# Allegro board PROIECT-PCB-v3.brd
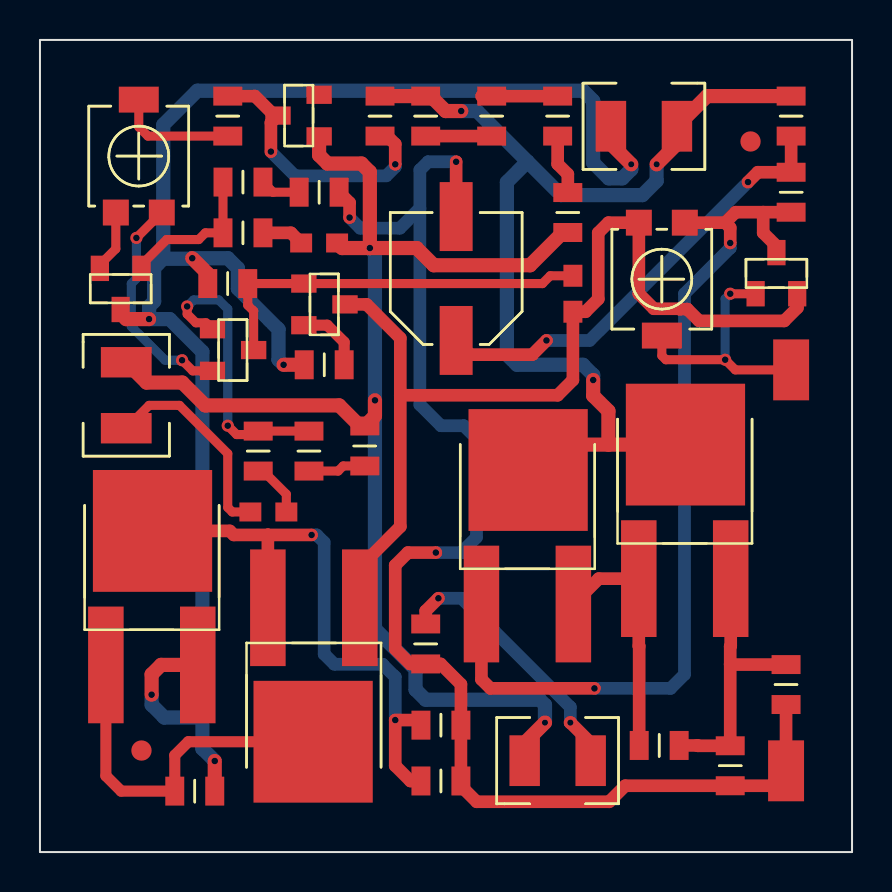
[diagram p0: board, top side]
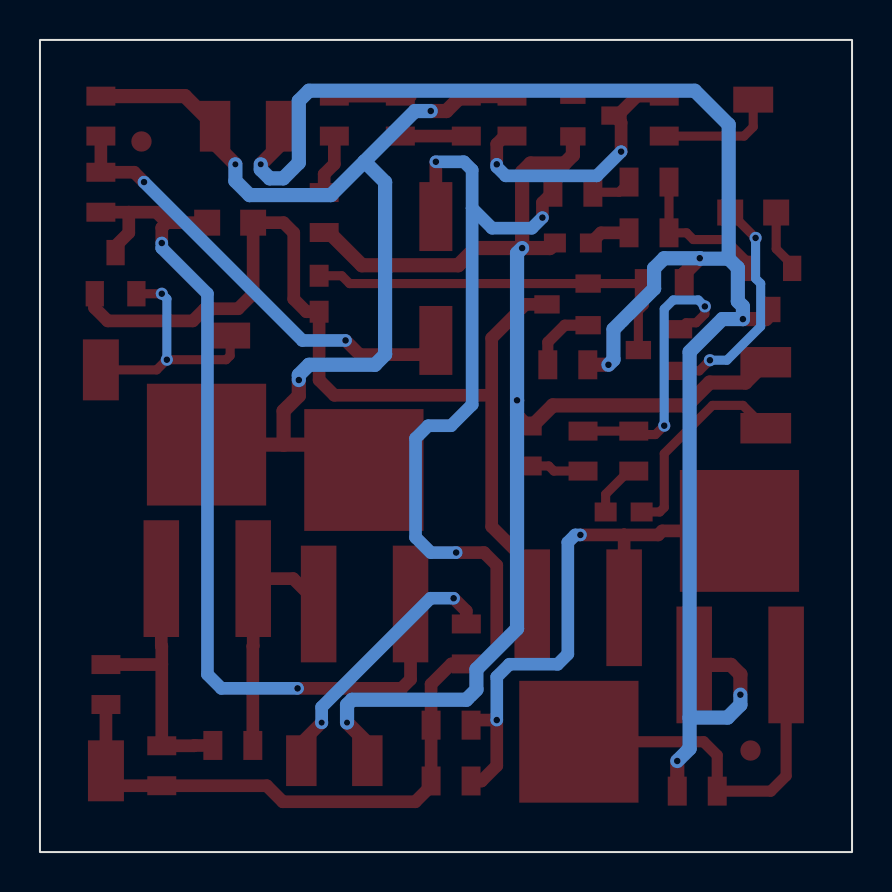
[diagram p1: board, bottom side, seen from below]

Outline 40.64 x 40.64 mm; copper layers: TOP, BOTTOM. Coordinates in mm from the lower left corner of the outline.
Outline path: rectangle 0,0 40.64,40.64

## Design rules (mm)
nets with their own width: min track width 0.457; nets N17839 N18413 N18419 N18433 N18443 N18567 N18575 N18713 N20372 N20376 SIGNAL-IN
nets with their own width: min track width 0.559; nets N18985 N19025
nets with their own width: min track width 0.635; nets N17849 N17953 N18017 N18083 N18151 N18611 N18637 N18835 N24736 N25913 N26075 N26146 SIGNAL-OUT
nets with their own width: min track width 0.711; nets +27V -27V GND

## Placement (name value [footprint] x y rotation side)
AAP-STEFAN MIHAI 432A  CON1  [unnamed#3]  37.59 24.13 90 top
C1  4.7u  [CAPC2008X126N_0805]  11.43 17.02 0 top
C2  4.7u  [CAPC2008X126N_0805]  13.97 30.48 0 top
C3  10u  [CAPAE660X770N]  20.83 28.7 90 top
C4  4.7p  [CAPC2008X126N_0805]  26.67 27.94 270 top
D1  BZX84-C10  [TO236AB]  13.97 35.81 0 top
D2  LED  [RES2012X50N_0805]  26.42 32 270 top
IN  -  [unnamed]  4.32 22.86 90 top
J5  CON1  [SMD_PAD_3-05_1-80]  37.34 4.06 270 top
NOREF  -  [#2]  0 0 0 top
NOREF#2  Value  [unnamed#2]  35.56 35.56 0 top
NOREF#3  Value  [unnamed#2]  5.08 5.08 0 top
OUT  -  [unnamed]  25.91 4.57 180 top
Q1  QBC856B  [TO236AB]  8.64 26.16 180 top
Q2  QBC856B  [TO236AB]  5.08 29.21 90 top
Q3  QBC817-25  [TO236AB]  13.21 28.45 180 top
Q4  QBC846B  [TO236AB]  35.81 27.94 270 top
Q5  QMJD31C  [TO252AA]  22.1 12.45 0 top
Q6  QMJD32CT4G  [TO252AA]  16 12.19 180 top
Q7  QMJD31C  [TO252AA]  29.97 13.72 0 top
Q8  QMJD31C  [TO252AA]  3.3 9.4 0 top
R1  4.7  [RES2012X50N_0805]  10.92 20.07 90 top
R7  3.3k  [RES2012X50N_0805]  17.02 36.83 90 top
R8  15k  [RES2012X50N_0805]  9.4 36.83 90 top
R9  500  [TS53YL]  6.1 32 270 top
R10  3.3k  [RES2012X50N_0805]  10.16 30.99 0 top
R11  5.6k  [RES2012X50N_0805]  9.4 28.45 180 top
R12  330  [RES2012X50N_0805]  37.59 36.83 270 top
R13  3.3k  [RES2012X50N_0805]  37.59 33.02 270 top
R14  5k  [TS53YL]  29.97 31.5 90 top
R15  33  [RES2012X50N_0805]  14.22 24.38 180 top
R26  0.47  [RES2012X50N_0805]  30.99 5.33 0 top
R27  0.47  [RES2012X50N_0805]  7.75 3.05 0 top
R30  4.7  [RES2012X50N_0805]  19.3 10.41 90 top
R31  8.2k  [RES2012X50N_0805]  10.16 33.53 0 top
R32  22k  [RES2012X50N_0805]  13.97 33.02 0 top
R61  8.2k  [RES2012X50N_0805]  13.46 20.07 270 top
R62  22k  [RES2012X50N_0805]  16.26 20.32 90 top
R71  1k  [RES2012X50N_0805]  19.3 36.83 90 top
R72  220  [RES2012X50N_0805]  22.61 36.83 90 top
R73  33  [RES2012X50N_0805]  25.91 36.83 270 top
R281  1  [RES2012X50N_0805]  34.54 4.32 270 top
R282  0.47  [RES2012X50N_0805]  37.34 8.38 270 top
R291  1  [RES2012X50N_0805]  20.07 3.56 180 top
R292  0.47  [RES2012X50N_0805]  20.07 6.35 180 top
UNK+27V  -  [unnamed]  30.23 36.32 0 top

## Library data of the parts
C1 C2 C4 = CAP
C3 = CAPACITOR POL/SM_0
D1 = TCR22-2/TO_0
D2 = LED
J5 = CON1
Q1 = PNP BCE_0
Q2 = PNP BCE_1
Q3 = NPN BCE_0
Q4 = NPN BCE_1
Q5 Q7 Q8 = NPN BCE
Q6 = PNP BCE
R1 R7 R8 R10-R13 R15 R26 R27 R30-R32 R61 R62 R281 R282 R291 R292 = R
R9 R14 = POT
R71-R73 = RESISTOR

## Footprints (pads in the part's own frame, mm; a bottom-side part is the same pattern mirrored in y, then rotated)
CAPAE660X770N
  rect 3.45x1.65 smd: 1(-3.1,0) 2(3.1,0)
CAPC2008X126N_0805
  rect 1.1x0.95 smd: 1(-0.9,0) 2(0.9,0)
RES2012X50N_0805
  rect 0.95x1.45 smd: 1(-1,0) 2(1,0)
SMD_PAD_3-05_1-80
  rect 3.05x1.8 smd: 1(0,0)
TO236AB
  rect 1.27x0.914 smd: 1(0,0) 2(0,2.083) 3(-2.057,1.041)
TO252AA
  rect 1.778x5.842 smd: 1(-0.004,-0.034) 3(4.596,-0.034)
  rect 5.969x6.096 smd: 2(2.332,6.673)
TS53YL
  rect 1.3x1.3 smd: 1(0,0) 3(0,-2.3)
  rect 1.3x2 smd: 2(-5.65,-1.15)
unnamed
  rect 1.524x2.54 smd: 1(-1.651,0) 2(1.651,0)
unnamed#3
  rect 3.05x1.8 smd: 1(0,0)
unnamed#2
  round 1.016 smd: 1(0,0)

## Nets
+27V: Q5.2 Q7.2 R7.2 R12.1 R71.2 UNK+27V.2
-27V: Q2.3 Q8.3(E) R11.2 R15.2 R27.2 UNK+27V.1
GND: C2.2 D1.1 D2.2(CATHODE) IN.2 OUT.2 R62.2
SIGNAL-IN: C1.1 IN.1
SIGNAL-OUT: OUT.1 R30.2
N17839: R8.1 R9.2(WIPER)
N17849: D1.3 R7.1 R8.2
N17953: Q4.3 Q5.1 R13.2 R14.3
N18017: Q5.3(E) Q7.1 R26.1
N18083: C3.1 R12.2 R13.1
N18151: Q7.3(E) R26.2 R281.1 R282.1
N18413: C1.2 R1.1
N18419: Q1.1 R1.2 R61.1
N18433: Q2.1 R10.1 R31.1
N18443: R31.2 R32.1
N18567: C4.1 Q1.3 Q3.1 R11.1
N18575: AAP-STEFAN MIHAI 432A.1 Q4.1 R14.2(WIPER)
N18611: C4.2 Q3.3 Q4.2(E) Q6.1 R14.1
N18637: C3.2(CATHODE) J5.1 R30.1 R32.2 R281.2 R282.2 R291.1 R292.1
N18713: R61.2 R62.1
N18835: Q6.3(E) Q8.2 R291.2 R292.2
N18985: Q6.2 Q8.1 R27.1
N19025: Q3.2(E) R15.1
N20372: Q2.2(E) R9.3
N20376: Q1.2(E) R9.1
N24736: C2.1 R10.2
N25913: R72.2 R73.1
N26075: D2.1 R73.2
N26146: R71.1 R72.1

Pads without a net: D1 2; NOREF#2 1; NOREF#3 1

## Via types
v1: diameter 0.61, hole 0.33, TOP to BOTTOM, 27 vias
v2: diameter 0.66, hole 0.305, TOP to BOTTOM, 4 vias

## Routing (per net, layer and track width the routed paths; a pad name or vN(x,y) marks a point on that pad's centre or on a via; arc(x,y) is an arc through that point)
+27V: length 52.7
  TOP w0.711: R12.1 33.38,37.83 UNK+27V.2 31.88,35.43 v2(30.86,34.42) ; Q7.2 28.45,20.39 ; 28.45,20.39 28.45,22.07 27.69,22.83 v1(27.69,23.62) ; 28.45,20.39 25.7,20.39 Q5.2 ; v1(21.08,37.08) 20.3,37.08 19.55,37.83 R71.2 R7.2
  BOTTOM w0.711: v2(30.86,34.42) 30.86,33.59 30.15,32.88 26.08,32.88 24.4,34.56 ; v1(27.69,23.62) 27.69,23.88 27.18,24.38 23.88,24.38 23.37,24.89 23.37,33.53 24.4,34.56 ; 24.4,34.56 21.87,37.08 v1(21.08,37.08)
-27V: length 87.1
  TOP w0.711: v1(12.19,24.38) R15.2 ; v2(29.59,34.42) 28.57,35.43 UNK+27V.1 ; v1(5.59,7.87) 5.59,8.89 6.06,9.36 Q8.3 ; v1(5.46,26.67) 4.32,26.67 4.04,26.95 Q2.3 ; R27.2 v1(8.75,4.56) ; v1(7.62,29.72) 8.4,28.94 R11.2 8.38,28.43
  BOTTOM w0.711: 8.13,6.73 8.13,5.17 v1(8.75,4.56) ; 8.13,6.73 8.13,25.03 6.49,26.67 v1(5.46,26.67) 5.46,27.3 5.71,27.56 5.71,29.24 6.17,29.69 ; 8.13,6.73 6.22,6.73 5.59,7.37 v1(5.59,7.87) ; 6.17,29.69 6.17,36.4 7.87,38.1 27.18,38.1 27.69,37.59 27.69,34.49 28.46,33.72 29.14,33.72 29.59,34.16 v2(29.59,34.42) ; 6.17,29.69 7.6,29.69 v1(7.62,29.72) 9.4,29.72 9.91,29.21 9.91,28.19 11.94,26.16 11.94,24.64 v1(12.19,24.38)
GND: length 68.1
  TOP w0.711: v1(16.51,30.23) 15.12,30.23 C2.2 ; v1(16.51,30.23) 18.85,30.23 19.71,29.37 24.53,29.37 26.17,31 D2.2 ; v1(16.51,30.23) 16.51,34.04 16.09,34.46 14.39,34.46 13.97,34.87 D1.1 ; v1(16.76,22.61) 16.76,21.83 R62.2 16.01,21.32 14.97,22.35 8.27,22.35 7.12,23.5 5.33,23.5 IN.2 ; OUT.2 24.26,5.46 v2(25.27,6.48)
  BOTTOM w0.711: v1(16.51,30.23) 16.76,29.97 v1(16.76,22.61) 16.76,11.18 18.8,9.14 18.8,8.13 19.3,7.62 25.02,7.62 25.27,7.37 v2(25.27,6.48)
SIGNAL-IN: length 10.5
  TOP w0.457: C1.1 9.62,17.02 9.4,17.24 9.4,19.94 6.99,22.35 5.46,22.35 IN.1
SIGNAL-OUT: length 13.5
  TOP w0.635: R30.2 19.3,12.06 v1(19.94,12.7) ; v2(26.54,6.48) 27.56,5.46 OUT.1
  BOTTOM w0.635: v2(26.54,6.48) 26.54,7.25 21.09,12.7 v1(19.94,12.7)
N17839: length 6
  TOP w0.457: R8.1 5.4,35.83 4.95,36.29 R9.2
N17849: length 13.8
  TOP w0.635: v1(11.56,35.05) 11.56,36.5 D1.3 11.73,36.86 10.76,37.83 R8.2 ; R7.1 17.38,35.83 17.78,35.43 v1(17.78,34.42)
  BOTTOM w0.635: v1(17.78,34.42) 17.78,34.29 17.33,33.84 12.77,33.84 v1(11.56,35.05)
N17953: length 45.9
  TOP w0.635: Q4.3 36.86,30.33 36.2,30.99 36.2,32.02 ; 36.2,32.02 R13.2 ; 36.2,32.02 34.81,32.02 34.29,31.5 ; 34.29,31.5 R14.3 ; 34.29,31.5 34.54,31.24 v1(34.54,30.48) ; Q5.1 22.09,8.64 22.54,8.19 v1(27.75,8.19)
  BOTTOM w0.635: v1(27.75,8.19) 31.56,8.19 32.26,8.89 32.26,27.94 34.54,30.23 v1(34.54,30.48)
N18017: length 12.2
  TOP w0.635: Q5.3 27.96,13.68 Q7.1 29.97,10.32 29.99,10.3 R26.1
N18083: length 22.6
  TOP w0.635: R12.2 R13.1 35.92,34.02 v1(35.43,33.53) ; C3.1 21.54,24.89 24.64,24.89 v1(25.35,25.6)
  BOTTOM w0.635: v1(35.43,33.53) 27.51,25.6 v1(25.35,25.6)
N18151: length 13.7
  TOP w0.635: 34.54,9.4 R281.1 32.92,5.32 32.91,5.33 R26.2 ; 34.54,9.4 34.56,9.38 R282.1 ; 34.54,9.4 34.54,10.29 34.57,10.32 Q7.3
N18413: length 2.8
  TOP w0.457: R1.1 11.17,19.07 12.33,17.91 C1.2
N18419: length 14.5
  TOP w0.457: Q1.1 8.31,26.49 7.8,26.49 7.37,26.92 v1(7.37,27.3) ; R61.1 R1.2 10.75,20.89 9.84,20.89 v1(9.4,21.34)
  BOTTOM w0.457: v1(7.37,27.3) 7.69,27.63 8.95,27.63 9.4,27.18 v1(9.4,21.34)
N18433: length 7.5
  TOP w0.457: R31.1 R10.1 8.28,30.99 7.94,30.65 6.34,30.65 5.08,29.39 Q2.1
N18443: length 2
  TOP w0.457: R32.1 11.67,33.02 R31.2
N18567: length 19.9
  TOP w0.457: C4.1 25.54,28.84 25.15,28.45 Q3.1 R11.1 10.4,27.37 10.69,27.07 Q1.3
N18575: length 12.4
  TOP w0.457: v1(34.54,27.94) Q4.1 ; R14.2 31.12,24.84 31.32,24.64 v1(34.29,24.64) 34.8,24.13 AAP-STEFAN MIHAI 432A.1
  BOTTOM w0.457: v1(34.54,27.94) 34.29,27.69 v1(34.29,24.64)
N18611: length 50.3
  TOP w0.635: 18.03,22.86 18.03,25.72 16.34,27.41 Q3.3 ; 18.03,22.86 25.91,22.86 26.67,23.62 C4.2 27.3,27.04 27.94,27.68 27.94,30.99 28.45,31.5 R14.1 29.97,27.94 30.72,27.19 31.99,27.19 32.01,27.17 32.4,27.17 32.99,26.58 37.25,26.58 37.91,27.24 37.91,27.93 Q4.2 ; 18.03,22.86 18.03,16.29 16.01,14.26 Q6.1
N18637: length 69.1
  TOP w0.635: R32.2 15.49,32.5 v1(15.49,31.75) ; R282.2 J5.1 36.59,3.32 R281.2 29.29,3.32 28.49,2.52 21.86,2.52 21.07,3.31 R291.1 R292.1 21.07,8.4 20.05,9.41 R30.1 18.53,9.41 17.78,10.16 17.78,14.35 18.41,14.99 v1(19.81,14.99) ; C3.2 v1(20.83,34.54)
  BOTTOM w0.635: v1(15.49,31.75) 16.02,31.22 18.01,31.22 19.01,32.22 ; 19.01,32.22 19.01,34.13 19.42,34.54 v1(20.83,34.54) ; 19.01,32.22 19.01,22.39 20.07,21.34 21.21,21.34 21.84,20.7 21.84,15.75 21.08,14.99 v1(19.81,14.99)
N18713: length 2.9
  TOP w0.457: R62.1 15.18,19.32 14.92,19.07 R61.2
N18835: length 29.5
  TOP w0.635: 11.41,15.87 11.41,15.87 v1(13.59,15.87) ; 11.41,15.87 Q6.3 ; 11.41,15.87 11.4,15.87 9.7,15.87 9.5,16.07 Q8.2 ; R291.2 18.54,3.56 17.78,4.32 v1(17.78,6.6) 18.81,6.6 R292.2
  BOTTOM w0.635: v1(17.78,6.6) 17.78,8.76 17.14,9.4 14.73,9.4 14.22,9.91 14.22,15.49 13.85,15.87 v1(13.59,15.87)
N18985: length 18.3
  TOP w0.559: Q6.2 7.42,5.52 6.75,4.84 R27.1 4.06,3.05 3.3,3.81 Q8.1
N19025: length 3.5
  TOP w0.559: R15.1 15.22,25.52 14.37,26.37 Q3.2
N20372: length 3.1
  TOP w0.457: Q2.2 3,29.39 3.8,30.19 R9.3
N20376: length 11.3
  TOP w0.457: v1(7.11,24.61) 7.65,24.08 Q1.2 ; R9.1 v1(4.83,30.73)
  BOTTOM w0.457: v1(7.11,24.61) 6.26,24.61 4.57,26.3 4.57,28.45 4.83,28.7 v1(4.83,30.73)
N24736: length 2.1
  TOP w0.635: C2.1 12.56,30.99 R10.2
N25913: length 3.8
  TOP w0.635: R73.1 R72.2 22.1,37.83
N26075: length 3
  TOP w0.635: D2.1 26.42,33.92 25.91,34.43 R73.2
N26146: length 3.3
  TOP w0.635: R71.1 R72.1

## Text on the board
XSECTION_CHART: *  SURFACE | L1 TOP CONDUCTOR | *  DIELECTRIC | L2 BOTTOM CONDUCTOR | DESIGN CROSS SECTION CHART | ___________________________ | TOTAL THICKNESS 60 MIL | 1-2
COMPVAL_TYPE_TOP: FIGURE | FINISHED_SIZE | 12.0 | 13.0 | DRILL CHART: TOP to BOTTOM | ALL UNITS ARE IN MILS | PLATED | QTY | 4 | 27
